# Altium PCB PCB7.PcbDoc
Units mm, origin at the board's own origin, x right, y up, seen from the top; angles counter-clockwise.
Board outline 100.84 x 70.1 mm, 2 copper layers (Top Layer, Bottom Layer); 30 components, 39 nets, 155 pads, 3 vias.
Unrouted connection lines stored in the file: 1.
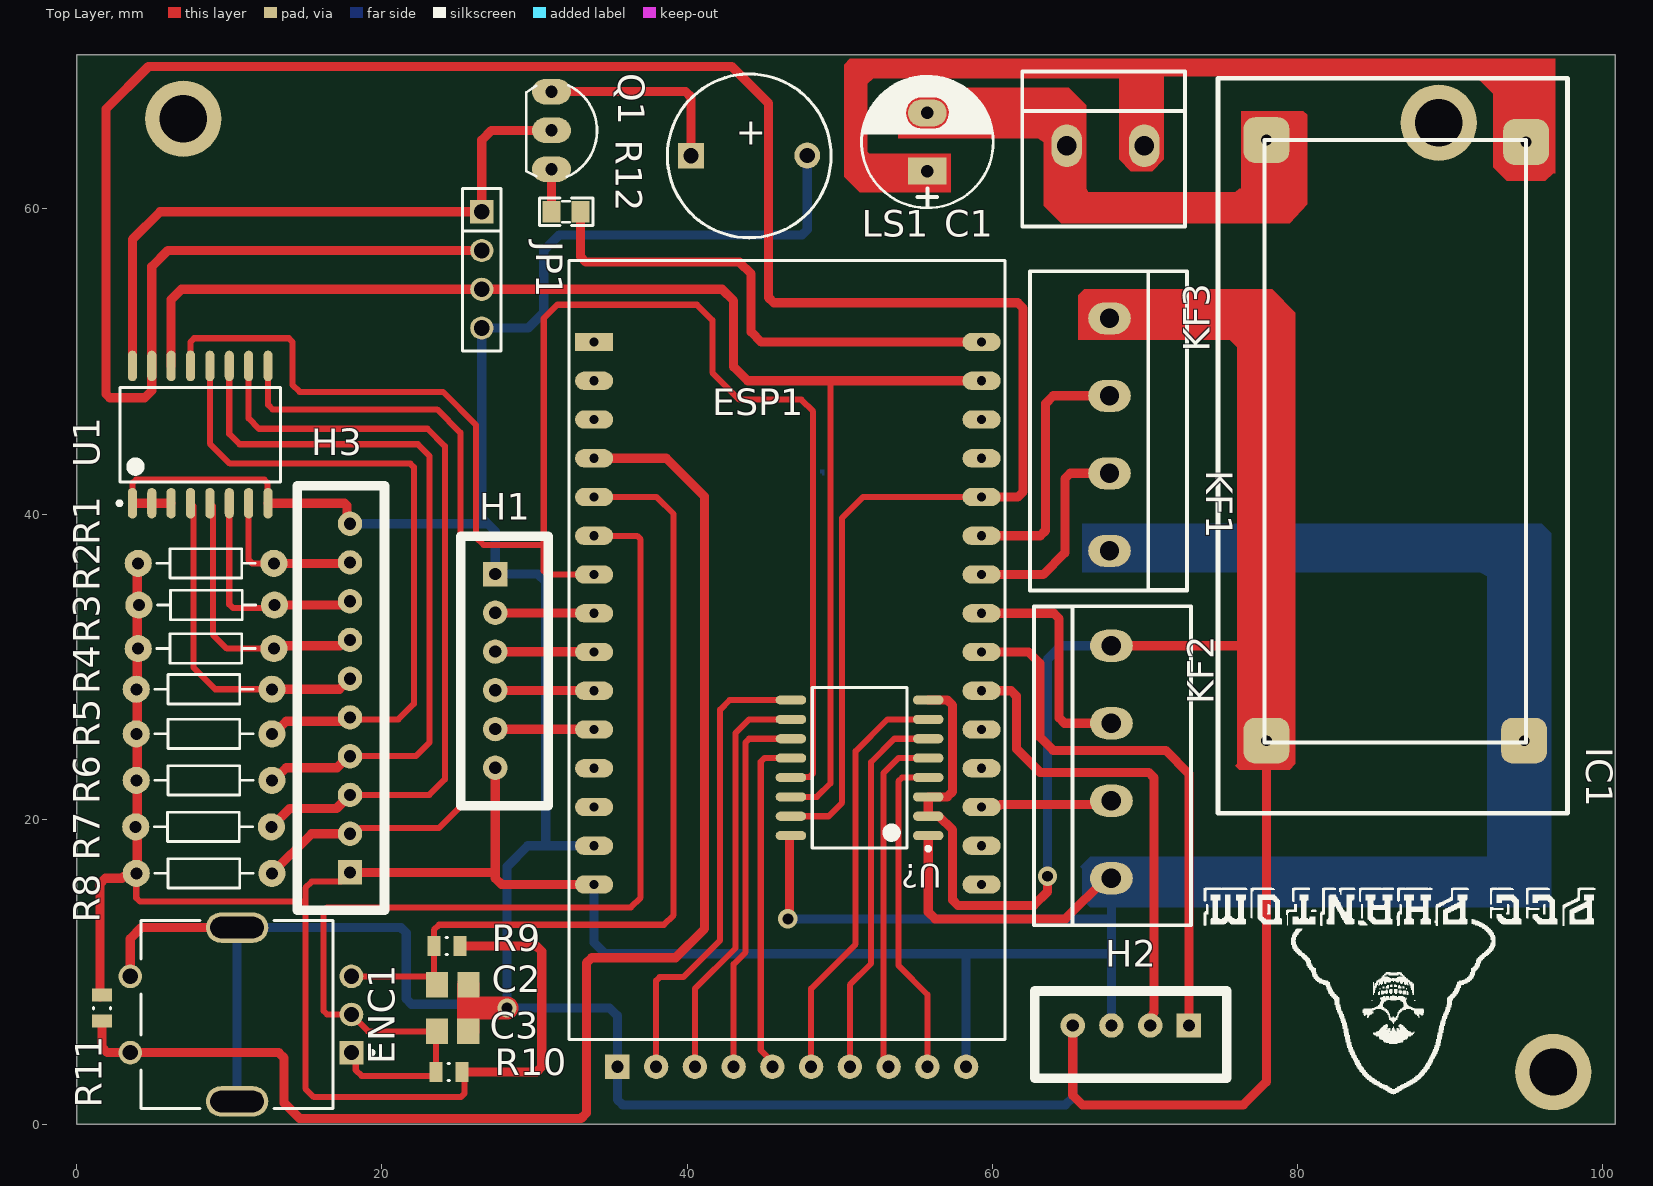
[diagram p0: Top Layer view]
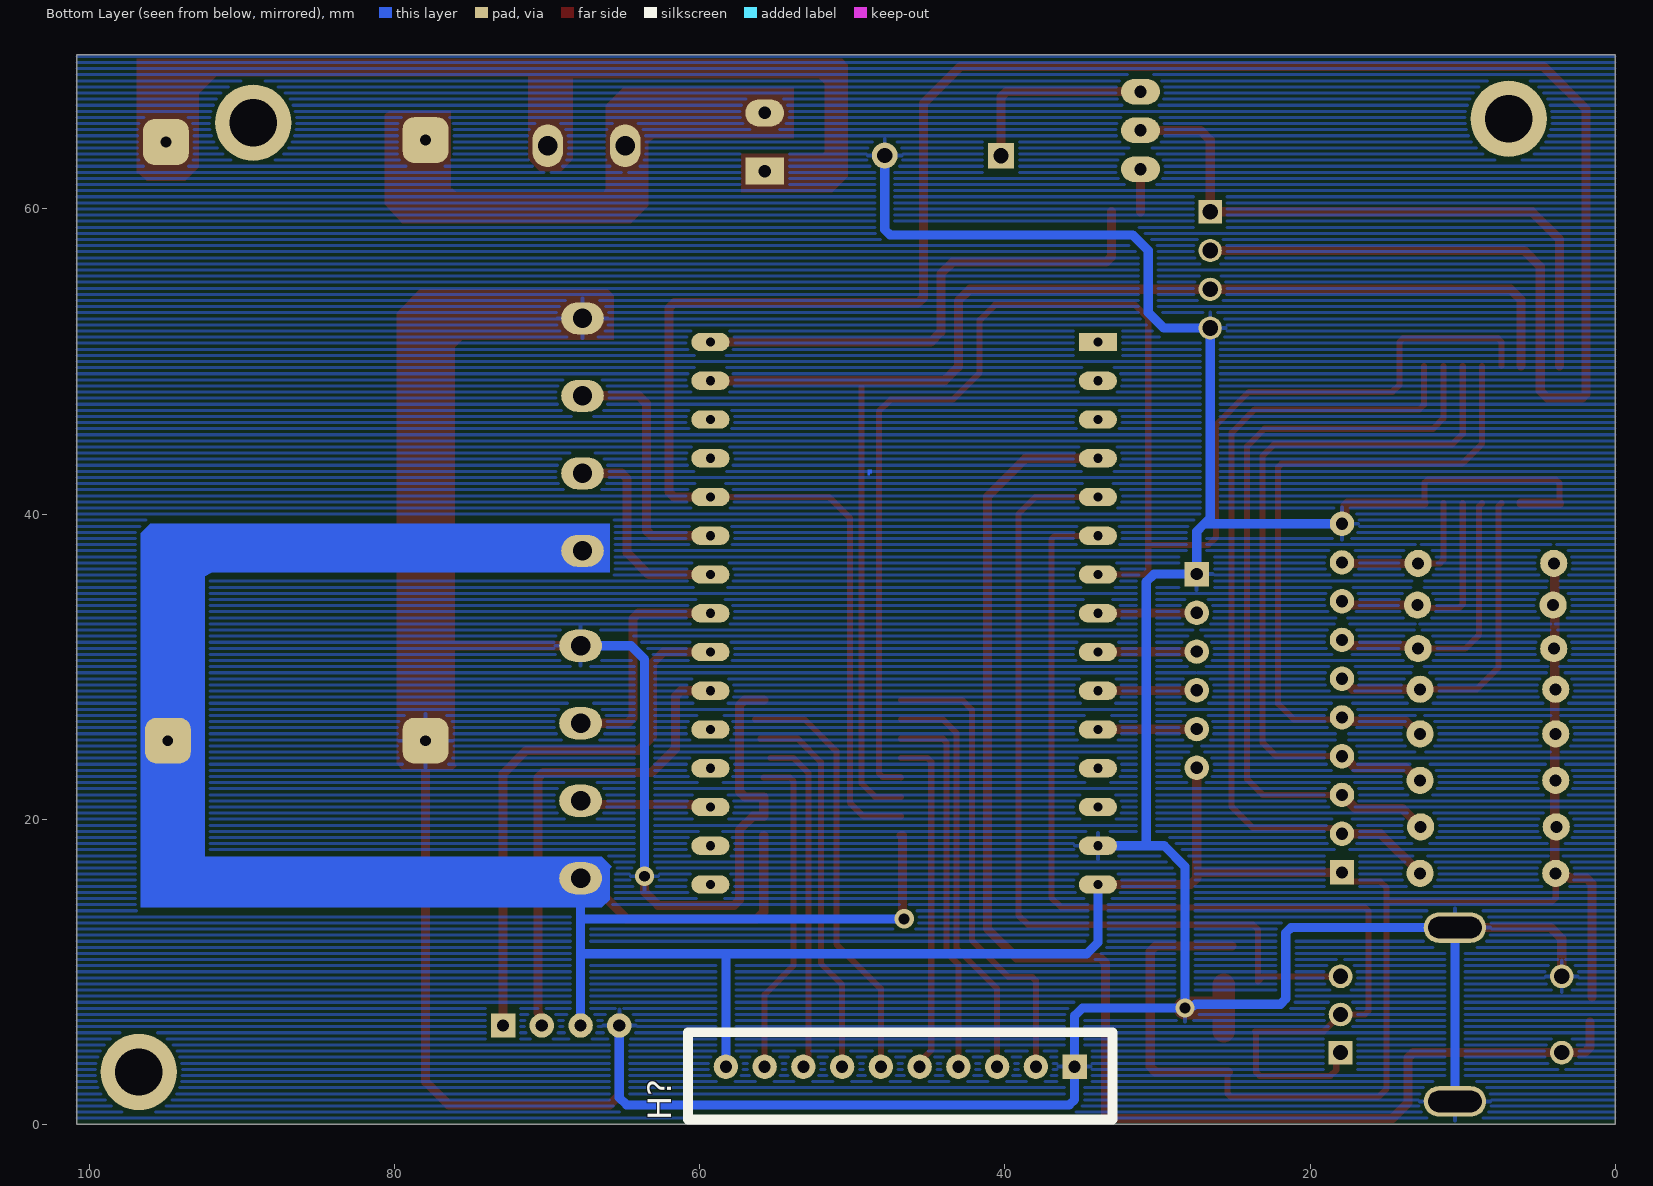
[diagram p1: Bottom Layer view, seen from below]
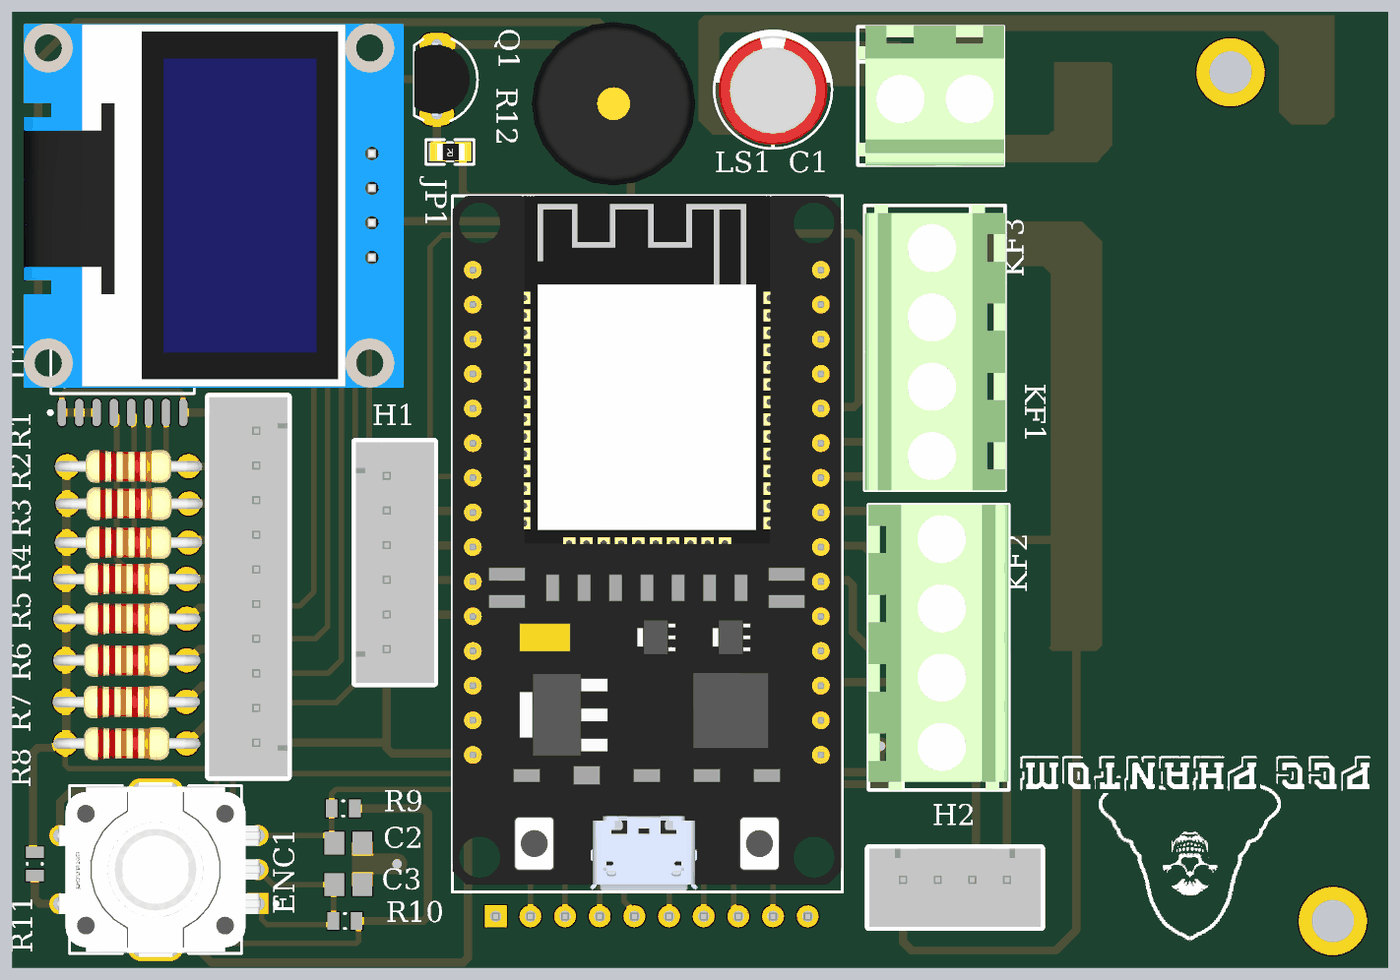
[diagram p2: 3D render of the assembled board from above, using the file's embedded part models]

## Layer stack, top to bottom
Top Solder: solder mask 0.0102, Solder Resist, Dk 3.5
Top Layer: signal copper 0.0356
Dielectric 1: dielectric 0.32, FR-4, Dk 4.8
Bottom Layer: signal copper 0.0356
Bottom Solder: solder mask 0.0102, Solder Resist, Dk 3.5

## Board outline
0,0 100.838,0 100.838,70.104 0,70.104

## Design rules (kind name [scope] priority, off if disabled: settings)
Clearance [All] p1: gap=0.254 ignorepadtopadclearanceinfootprint=FALSE
PolygonConnect [All] p1: connectstyle=Relief reliefconductorwidth=0.254 reliefentries=4 polygonreliefangle="90 Angle" airgapwidth=0.254
RoutingVias [All] p1: holewidth=0.711 width=1.27 viastyle="Through Hole" minholewidth=0.711 minwidth=1.27 maxholewidth=0.711 maxwidth=1.27
SolderMaskExpansion [All] p1: expansion=0.102 istentingtop=FALSE
Width [All] p1: maxlimit=0.6 minlimit=0.4 preferedwidth=0.5
30 further rules are at their usual default settings.

## Components (designator, comment, footprint, x,y, rotation, side; value= is the part's Value field where it differs from the comment)
C1 "100uF/35V" CP1.5/3.4 55.753,62.484 r90 top value=100uF/35V/50V
C2 "C0805X104K4RACTU" CAPC2113X100X50ML30T10 24.638,9.144 r180 top
C3 "C0805X104K4RACTU" CAPC2113X100X50ML30T10 24.629,6.096 r180 top
ENC1 "PEC11L-4020K-S0020" FP-PEC11L-4020K-S0020-MFG 10.502,7.199 r90 top
ESP1 "ESP32 DEVKIT" "ESP32 WROOM 32 KIT" 33.909,51.276 r0 top
H1 "XH-2.54-6P" XH2.54M-6 27.432,36.068 r270 top
H2 "XH-2.54-4P" XH2.54M-4 72.898,6.477 r180 top
H3 "XH-2.54-10P" XH2.54M-10 17.907,16.51 r90 top
H? "XH-2.54-10P" XH2.54M-10 35.433,3.778 r0 bottom
IC1 "lm2596" lm2596 68.326,82.677 r270 top
JP1 "oled" "oled 0.96" 1.143,69.342 r270 top
KF1 "4P" KF128-4P 78.867,58.166 r270 top
KF2 "4P" KF128-4P 56.642,10.795 r90 top
KF3 "2P" KF128-2P 72.644,69.088 r180 top value="Domino KF128 2P GREEN"
LS1 "Coi Chip Speaker" "Coi Chip Speacker" 40.259,63.487 r0 top
Q1 "2SC1815" TO92-123 31.115,65.151 r270 top value=C1815
R1 "1k" R1/4W 12.915,36.771 r180 top value="R1/4W - 1K"
R2 "1k" R1/4W 12.954,34.036 r180 top value="R1/4W - 1K"
R3 "1k" R1/4W 12.915,31.183 r180 top value="R1/4W - 1K"
R4 "1k" R1/4W 12.788,28.516 r180 top value="R1/4W - 1K"
R5 "1k" R1/4W 12.788,25.595 r180 top value="R1/4W - 1K"
R6 "1k" R1/4W 12.788,22.547 r180 top value="R1/4W - 1K"
R7 "1k" R1/4W 12.75,19.499 r180 top value="R1/4W - 1K"
R8 "1k" R1/4W 12.788,16.451 r180 top value="R1/4W - 1K"
R9 "10K 5% 0805(2012)" RESC0805(2012)_L 24.257,11.684 r0 top value="10000.00 Ohm"
R10 "10K 5% 0805(2012)" RESC0805(2012)_L 24.384,3.429 r0 top value="10000.00 Ohm"
R11 "10K 5% 0805(2012)" RESC0805(2012)_L 1.651,7.62 r90 top value="10000.00 Ohm"
R12 "10k" "tro smd 0805" 32.074,59.756 r180 top
U1 "PCF8574DWRE4" DW16_L 8.089,45.212 r90 top
U? "PCF8574DWRE4" DW16_L 51.308,23.368 r180 top

## Footprints (in the part's own frame and the unit in brackets; to place one, negate y for a bottom-side part, rotate by r counter-clockwise, add the part's x,y. Pads: shape width x height; smd on the part's side, far side on the other; paste and mask are expansions set on the pad)
CAPC2113X100X50ML30T10 [mm] "Chip Capacitor, 2-Leads, Body 2.10x1.25mm, IPC Low Density"
  rect 1.45x1.65 smd: 1(-1.025,0) 2(1.025,0)
  body extent -1.2,-0.77 1.2,0.77, height 1
"Coi Chip Speacker" [mm]
  rect 1.7x1.7 hole 1: 1(0,0)
  round 1.7 hole 1: 2(7.62,0.013)
  silkscreen extent -1.55,-5.38 9.18,5.36, body extent -2.19,-6.13 9.81,5.87, height 9.5
CP1.5/3.4 [mil] "Tu hoa 220->470uF,16V, 470uF/16V,25V"
  rect 70x100 hole 32: 1(0,0)
  oval 70x100 hole 32: 2(150,0)
  silkscreen extent -95,-170 245,170, body extent -85,-157 230,157, height 446
DW16_L [mm] "SOIC, 16-Leads, Body 10.3x7.5mm, Pitch 1.27mm, IPC High Density"
  oval 2x0.6 smd: 1(-4.5,4.445) 2(-4.5,3.175) 3(-4.5,1.905) 4(-4.5,0.635) 5(-4.5,-0.635) 6(-4.5,-1.905) 7(-4.5,-3.175) 8(-4.5,-4.445) 9(4.5,-4.445) 10(4.5,-3.175) 11(4.5,-1.905) 12(4.5,-0.635) 13(4.5,0.635) 14(4.5,1.905) 15(4.5,3.175) 16(4.5,4.445)
  silkscreen extent -4.62,-5.25 3.1,5.42, body extent -3.79,-5.25 3.8,5.25, height 2.64
"ESP32 WROOM 32 KIT" [mm]
  rect 2.5x1.2 hole 0.6: 1(0,0)
  oval 2.5x1.2 hole 0.6: 2(0,-2.54) 3(0,-5.08) 4(0,-7.62) 5(0,-10.16) 6(0,-12.7) 7(0,-15.24) 8(0,-17.78) 9(0,-20.32) 10(0,-22.86) 11(0,-25.4) 12(0,-27.94) 13(0,-30.48) 14(0,-33.02) 15(0,-35.56) 16(25.4,-35.56) 17(25.4,-33.02) 18(25.4,-30.48) 19(25.4,-27.94) 20(25.4,-25.4) 21(25.4,-22.86) 22(25.4,-20.32) 23(25.4,-17.78) 24(25.4,-15.24) 25(25.4,-12.7) 26(25.4,-10.16) 27(25.4,-7.62) 28(25.4,-5.08) 29(25.4,-2.54) 30(25.4,0)
  silkscreen extent -1.65,-45.72 26.92,5.33, body extent -1.65,-45.6 26.85,5.33, height 10.49
FP-PEC11L-4020K-S0020-MFG [mm]
  round 1.55 hole 1 paste-2539.97 mask+0: 1(-2.5,7) 2(2.5,7) B(2.5,-7.5) C(0,-7.5)
  rrect100% 2x4.1 hole 3.5 slot 1.4 at 0 deg paste-2539.97 mask+0: 3(-5.7,0) 4(5.7,0)
  rect 1.55x1.55 hole 1 paste-2539.97 mask+0: A(-2.5,-7.5)
  silkscreen extent -6.15,-8.95 6.15,6.3, body extent -6.8,-8.37 6.8,7.88, height 0.25
KF128-2P [mm]
  oval 2x2.8 hole 1.27: 1(2.667,4.953) 2(7.747,4.953)
  silkscreen extent 0,0.08 10.67,10.24, body extent -0.05,0 10.71,10.3, height 14.59
KF128-4P [mm]
  oval 2.1x2.8 hole 1.27: 1(5.334,-11.176) 2(10.414,-11.176) 3(15.494,-11.176) 4(20.574,-11.176)
  silkscreen extent 2.25,-16.38 23.17,-6.1, body extent 2.24,-16.38 23.16,-6.08, height 14.59
lm2596 [mm]
  rrect50% 3x3 hole 0.7: 1(18.288,26.67) 2(18.161,9.652) 3(57.531,9.652) 4(57.531,26.543)
  silkscreen extent 14.1,6.48 62.3,29.39, body extent 14.1,6.35 62.1,29.35, height 12.71
"oled 0.96" [mm]
  rect 1.52x1.52 hole 1.02: 1(9.525,25.4)
  round 1.52 hole 1.02: 2(12.065,25.4) 3(14.605,25.4) 4(17.145,25.4)
  silkscreen extent 8.01,24.13 18.67,26.67, body extent 0.1,-0.3 26.8,27.56, height 11.47
R1/4W [mil] "R 1/4W, 2 Pin, 350mil"
  round 70 hole 31: 1(0,0) 2(350,0)
  silkscreen extent 48,-38 302,38, body extent -40,-47 386,47, height 111
RESC0805(2012)_L [mm] "Chip Resistor, Body 2.0x1.3mm, IPC High Density"
  rect 0.85x1.3 smd: 1(-0.85,0) 2(0.85,0)
  silkscreen extent -0.05,-0.55 0.05,0.55, body extent -1.1,-0.67 1.1,0.68, height 0.7
TO92-123 [mil] "TO-92"
  oval 66x100 hole 32: 1(-100,0) 2(0,0) 3(100,0)
  silkscreen extent -117,-65 120,118, body extent -109,-66 109,95, height 245
"tro smd 0805" [mm]
  rect 1.2x1.4 smd: 1(-0.946,-0.061) 2(0.954,-0.061)
  silkscreen extent -1.75,-0.97 1.75,0.84, body extent -1.56,-0.76 1.44,0.64, height 0.53
XH2.54M-4 [mm]
  rect 1.6x1.6 hole 0.8: 1(0,0)
  round 1.6 hole 0.8: 2(2.54,0) 3(5.08,0) 4(7.62,0)
  silkscreen extent -2.48,-2.26 10.1,3.46, body extent -2.48,-2.26 10.1,3.48, height 6.91
XH2.54M-6 [mm]
  rect 1.6x1.6 hole 0.8: 1(0,0)
  round 1.6 hole 0.8: 2(2.54,0) 3(5.08,0) 4(7.62,0) 5(10.16,0) 6(12.7,0)
  silkscreen extent -2.48,-2.26 15.18,3.46, body extent -2.48,-2.26 15.18,3.48, height 6.91
XH2.54M-10 [mm]
  rect 1.6x1.6 hole 0.8: 1(0,0)
  round 1.6 hole 0.8: 2(2.54,0) 3(5.08,0) 4(7.62,0) 5(10.16,0) 6(12.7,0) 7(15.24,0) 8(17.78,0) 9(20.32,0) 10(22.86,0)
  silkscreen extent -2.48,-2.26 25.34,3.46, body extent -2.48,-2.26 25.34,3.48, height 6.91

## Part data
C1: library part CP3, "Cap 100uF/35V - 470uF/16V", Description 1="1000uF/6,3V - 470uF/16V - 330uF - 25V", Description 2="220uF/35V - 100uF/50V - 63V - 4,7uF/200V", Description 3="22uF => 33uF100V - 3,3uF => 4,7uF/250V", Description 4="2,2uF =>3,3uF/350 - 2,2uF/400V - 1uF/450V"
C2 C3: library part CMP-2007-00010-1, Manufacturer=Kemet, Part Number=C0805X104K4RACTU
ENC1: library part CMP-07421-000057-1, "ROTARY ENCODER", Max Operating Temperature=80°C, Min Operating Temperature=-25°C, Package Quantity=75, Height=12mm, Length=24.5mm, Number of Channels=2, Output Type=Quadrature, Packaging=Bulk, RoHS Compliant=Yes, Termination="Through Hole", Width=11.8mm
ESP1: library part "ESP32 WROOM 32 KIT"
IC1: library part "lm2596 DC-DC", "BOARD MODULE"
JP1: library part "oled 0.96", "OLED", Chung_Loai=Cắm, Don_Vi=Con, Ma_Hang=MH004006, Ten_Linh_Kien="Jump Đơn Cái 2.54MM 1x20P Thẳng"
KF1 KF2: library part "KF128 4P 5.08MM", "DOMINO 5.08MM"
KF3: library part "KF128 2P 5.08MM", "DOMINO 5.08MM"
LS1: "Còi chip"
Q1: "NPN 600mW, ECB"
R1 R2 R3 R4 R5 R6 R7 R8: library part R1/4W, "Resistor 1/4W"
R9 R10 R11: library part CMP-1013-00098-1, "10K 0.125W 5% 0805 (2012 Metric)  SMD", Case-EIA=0805, Case-Metric=2012, Power="0.125 W", Tolerance="5 %", Technology=SMT
R12: library part "Tro 0805 1% 10k", "Dán", Chung_Loai=Dán, Don_Vi=Con, Ma_Hang=MH005473, So_Chan=2, Ten_Linh_Kien="Trở 0805 1% 10k"
U1 U?: library part CMP-0314-00118-1, "Remote 8-Bit I/O Expander for I2C-Bus, 2.5 to 6 V, -40 to 85 degC, 16-pin SOIC (DW), Green (RoHS & no Sb/Br)", Manufacturer="Texas Instruments", Max Frequency(kHz)=100, Voltage Nodes(V)="5, 3.3", # of I/Os=8, Code_JEDEC=MS-013-AA, ComponentLink1Description=Datasheet, ComponentLink1URL=http://www.ti.com/general/docs/lit/getliterature.tsp?genericPartNumber=PCF8574&fileType=pdf, ComponentLink2Description="Package Specification", ComponentLink2URL=http://www.ti.com/litv/pdf/msoi003g, DatasheetVersion=SCPS068G, Eco-Plan="Green (RoHS & no Sb/Br)", fSCLK(Max)(MHz)=0.1, I2C Address="0100 xxx", Interrupt Output=Yes, Mounting Technology="Surface Mount", PackageDescription="16-Pin Small Outline Integrated Circuit, 10.3 x 7.5 mm, Pitch 1.27 mm Pitch", PackageReference=DW16, PackageVersion="revG, Jan-2011", PartNumber=PCF8574DWRE4, Push-Pull I/O Type=Yes, Reset Input=No, SubFamily="I2C IO Expander", Vcc range(V)="2.5 to 6.0", VCC(Max)(V)=6, VCC(Min)(V)=2.5
H1: Chung_Loai=Cắm, Don_Vi=Con, Ma_Hang=MH001972, Ten_Linh_Kien="Header 6P XH2.54-6P Đực Thẳng"
H2: Chung_Loai=Cắm, Don_Vi=Con, Ma_Hang=MH001285, Ten_Linh_Kien="Header 4P XH2.54-4P Đực Thẳng"
H3 H?: Chung_Loai=Cắm, Don_Vi=Con, Ma_Hang=MH001286, Ten_Linh_Kien="Header 10P XH2.54-10P Đực Thẳng"

## Free pads (board coordinates)
  round 5 hole 3.1: 2(6.985,65.913) 2(89.281,65.659) 2(96.774,3.429)

## Via types
v1: diameter 1.27, hole 0.711, Top Layer to Bottom Layer, tented both sides, 3 vias

## Nets (pads, with @x,y where several pads share a name; then routed paths per layer and width w, separated by ;. In a path a pad name is that pad's centre, name@x,y a point inside that pad or via, vN(x,y) a via of type N, cw(c..) or ccw(c..) an arc to the next point about the centre after c; other vN are vias at no path point)
+5: ESP1.15 H1.6 H2.3 H3.1 H?.10 IC1.4 JP1.1 KF1.4 KF2.1 Q1.2 R1.2 R2.2 R3.2 R4.2 R5.2 R6.2 R7.2 R8.2 R9.2 R10.2 R11.2 U1.16 U?.1 U?.16 | length 331.2
  Top Layer w0.4: R8.2 3.898,14.839 4.133,14.605 14.986,14.605 ; H3.1 17.307,15.91 15.402,15.91 14.986,15.494 14.986,14.605 ; R10.2@25.4,3.429 25.4,2.012 25.166,1.778 15.544,1.778 14.986,2.336 14.986,14.605
  Top Layer w0.6: R11.2@1.524,8.345 1.524,15.778 1.875,16.129 2.958,16.129 3.054,16.225 3.673,16.225 R8.2 3.962,16.514 3.962,36.707 R1.2 ; U1.16 3.644,58 5.461,59.817 JP1.1 26.543,64.516 27.178,65.151 Q1.2 ; H3.1 27.432,16.51 ; R9.2 30.129,11.684 30.48,11.333 30.48,3.78 30.129,3.429 R10.2@25.359,3.429 ; H1.6 27.432,16.51 ; ESP1.15 27.845,15.716 27.432,16.129 27.432,16.51 ; v1(46.609,13.462) 46.708,13.561 46.708,18.923 U?.16 ; U?.1 55.808,13.915 56.261,13.462 64.801,13.462 67.468,16.129 KF2.1
  Bottom Layer w0.6: ESP1.15 33.909,11.908 34.641,11.176 58.42,11.176 ; v1(46.609,13.462) 67.818,13.462 ; H?.10 58.293,11.049 58.42,11.176 ; KF1.4 95.153,37.592 95.504,37.241 95.504,25.781 IC1.4 94.869,17.145 93.853,16.129 KF2.1 67.818,13.462 ; H2.3 67.818,11.176 67.818,13.462 ; 67.818,11.049 67.691,11.176 58.42,11.176
CHA_ROTARY: C2.2 ENC1.B ESP1.5 R9.1 | length 57
  Top Layer w0.4: ENC1.B 23.088,9.699 C2.2@23.407,9.38 ; C2.2@23.407,9.35 C2.2@23.407,9.38 ; ESP1.5 38.005,41.116 39.116,40.005 39.116,13.716 38.481,13.081 23.749,13.081 23.407,12.739 R9.1 C2.2@23.407,9.38
CHB_ROTARY: C3.2 ENC1.A ENC1.C ESP1.6 R10.1 | length 71.8
  Top Layer w0.4: ENC1.A 18.286,4.416 18.286,3.558 18.669,3.175 23.309,3.175 23.534,3.4 23.534,6.026 C3.2 19.105,6.096 ENC1.C 16.403,7.199 16.169,7.433 16.169,13.99 16.403,14.224 36.322,14.224 36.957,14.859 36.957,38.341 36.723,38.576 ESP1.6
GND: C2.1 C3.1 ENC1.2 ENC1.3 ENC1.4 ESP1.14 H1.1 H2.4 H3.10 H?.1 IC1.3 JP1.4 KF1.1 KF2.4 LS1.2 U1.1 U1.2 U1.3 U1.8 U?.2 U?.3 U?.8 | length 342
  Top Layer w0.4: U1.1 3.644,42.018 3.879,42.252 12.3,42.252 12.496,42.056 12.496,40.75 U1.8 ; C3.1 C3.1@25.658,6.1 ; C2.1@25.658,9.144 C2.1
  Top Layer w0.6: ENC1.2 3.502,12.168 4.233,12.899 ENC1.4 ; U1.1 U1.2 U1.3 ; U1.8 17.556,40.712 17.716,40.552 17.716,39.561 H3.10 ; U?.8 57.053,27.813 57.404,27.462 57.404,21.814 57.053,21.463 U?.3 U?.2 56.508,20.193 57.404,19.297 57.404,14.702 57.755,14.351 62.738,14.351 63.627,15.24 v1(63.627,16.256) ; H2.4 65.278,1.905 65.913,1.27 76.454,1.27 77.978,2.794 IC1.3 77.978,31.242 ; KF1.1 76.835,52.832 77.978,51.689 77.978,31.242 ; KF2.4 77.851,31.369 77.978,31.242
  Top Layer w1.5: C3.1@25.658,6.1 C2.1@25.658,9.144 ; 25.663,7.62 v1(28.194,7.62)
  Bottom Layer w0.6: ENC1.3 ENC1.4 21.239,12.899 21.59,12.548 21.59,8.225 21.941,7.874 27.508,7.874 ; H3.10 26.924,39.37 ; v1@27.633,7.748 28.066,7.748 v1(28.194,7.62) 34.925,7.62 35.433,7.112 H?.1 35.433,1.621 35.784,1.27 64.8,1.27 65.278,1.748 H2.4 ; v1@28.194,7.874 28.194,16.891 29.559,18.256 30.734,18.256 ; ESP1.14 30.734,18.256 ; LS1.2 47.879,58.644 47.528,58.293 31.623,58.293 30.607,57.277 30.607,53.213 29.591,52.197 JP1.4 26.543,39.751 26.924,39.37 ; v1(63.627,16.256) 63.627,30.48 64.516,31.369 KF2.4 ; 26.924,39.37 27.432,38.862 H1.1 30.226,36.068 30.734,35.56 30.734,18.256
INTERRUT_B: ESP1.7 U1.13 U?.13 | length 104.9
  Top Layer w0.4: U1.13 7.454,51.289 7.689,51.523 13.901,51.523 14.136,51.289 14.136,48.475 14.605,48.006 24.003,48.006 26.162,45.847 26.162,38.481 26.67,37.973 30.607,37.973 ; ESP1.7 30.861,36.036 ; U?.13 46.846,22.771 48.026,22.771 48.262,23.008 48.262,46.734 47.498,47.498 43.434,47.498 41.656,49.276 41.656,52.705 40.64,53.721 31.496,53.721 30.607,52.832 30.607,37.973 ; 30.607,36.29 30.607,37.973 ; 30.607,36.29 30.607,36.27 30.841,36.036 30.861,36.036 ; 30.607,36.29 30.734,36.163 30.861,36.036
NetC1_1: C1.1 IC1.1 KF3.1 | length 63.6
  Top Layer w0.6: C1.1 51.689,62.484 51.054,63.119 51.054,68.326 52.07,69.342 69.977,69.342 ; KF3.1 69.977,69.342 ; IC1.1 94.996,67.437 93.091,69.342 69.977,69.342
NetC1_2: C1.2 IC1.2 KF3.2 | length 31.2
  Top Layer w0.6: C1.2 63.881,66.294 64.232,65.943 64.232,65.578 64.897,64.914 KF3.2 64.897,60.549 65.248,60.198 76.962,60.198 77.978,61.214 IC1.2
NetLS1_1: LS1.1 Q1.1 | length 13.1
  Top Layer w0.6: Q1.1 39.908,67.691 40.259,67.34 LS1.1
NetQ1_3: Q1.3 R12.2 | length 2.8
  Top Layer w0.6: Q1.3 31.118,62.608 31.118,59.819 R12.2
PIN+BUZZER: ESP1.30 R12.1 | length 33.8
  Top Layer w0.6: R12.1 33.02,56.866 33.371,56.515 43.434,56.515 44.196,55.753 44.196,51.943 44.863,51.276 ESP1.30
PIN_5: ESP1.23 KF2.3 | length 15.3
  Top Layer w0.6: ESP1.23 64.038,33.496 64.389,33.144 64.389,26.64 64.74,26.289 KF2.3
PIN_14: ESP1.11 H1.5 | length 6.5
  Top Layer w0.6: H1.5 27.448,25.892 33.893,25.892 ESP1.11
PIN_15: ESP1.18 KF2.2 | length 8.7
  Top Layer w0.6: ESP1.18 59.424,20.91 60.498,20.91 60.543,20.955 67.564,20.955 KF2.2
PIN_18: ESP1.24 KF1.3 | length 14
  Top Layer w0.6: ESP1.24 63.341,36.036 64.77,37.465 64.77,42.321 65.121,42.672 KF1.3
PIN_19: ESP1.25 KF1.2 | length 17.1
  Top Layer w0.6: ESP1.25 63.149,38.576 63.5,38.927 63.5,47.244 64.008,47.752 KF1.2
PIN_25: ESP1.8 H1.2 | length 6.5
  Top Layer w0.6: H1.2 27.448,33.512 33.893,33.512 ESP1.8
PIN_26: ESP1.9 H1.3 | length 6.5
  Top Layer w0.6: H1.3 27.448,30.972 33.893,30.972 ESP1.9
PIN_27: ESP1.10 H1.4 | length 6.5
  Top Layer w0.6: H1.4 27.448,28.432 33.893,28.432 ESP1.10
RX: ESP1.21 H2.2 | length 32
  Top Layer w0.6: ESP1.21 61.244,28.416 61.595,28.064 61.595,24.608 63.138,23.065 70.261,23.065 70.612,22.714 70.612,7.328 70.549,7.266 70.549,6.668 H2.2
SCL: ESP1.29 JP1.3 U1.14 U?.14 | length 92.1
  Top Layer w0.4: U?.14 48.514,21.463 49.403,22.352 49.403,48.736 ; ESP1.29@58.659,48.736 ESP1.29
  Top Layer w0.6: U1.14 6.184,54.063 6.858,54.737 JP1.3 42.291,54.737 43.053,53.975 43.053,49.657 43.974,48.736 49.403,48.736 ESP1.29@58.659,48.736
SDA: ESP1.26 JP1.2 U1.15 U?.15 | length 174.5
  Top Layer w0.4: U?.15 49.276,20.193 50.165,21.082 50.165,39.751 51.53,41.116 ESP1.26
  Top Layer w0.6: JP1.2 5.969,57.277 4.914,56.222 U1.15 4.914,48.094 4.445,47.625 2.159,47.625 1.905,47.879 1.905,66.548 4.699,69.342 42.926,69.342 45.339,66.929 45.339,54.199 45.69,53.848 61.679,53.848 62.031,53.497 62.031,41.467 61.679,41.116 ESP1.26
SW1: H3.9 R1.1 U1.7 | length 10.5
  Top Layer w0.4: U1.7 11.264,37.005 11.499,36.771 R1.1
  Top Layer w0.6: R1.1 17.848,36.771 H3.9
SW2: H3.8 R2.1 U1.6 | length 14.7
  Top Layer w0.4: U1.6 9.994,34.084 10.229,33.85 R2.1@12.915,33.85
  Top Layer w0.6: R2.1 17.653,34.036 H3.8
SW3: H3.7 R3.1 U1.5 | length 18.3
  Top Layer w0.4: U1.5 8.924,40.512 8.924,32.097 9.838,31.183 R3.1
  Top Layer w0.6: R3.1 13.102,31.369 17.255,31.369 17.636,31.75 H3.7
SW4: H3.6 R4.1 U1.4 | length 22
  Top Layer w0.4: U1.4 7.654,40.512 7.654,29.938 9.077,28.516 R4.1
  Top Layer w0.6: R4.1 17.213,28.516 H3.6
SW5: H3.5 R5.1 U1.12 | length 44.9
  Top Layer w0.4: U1.12 8.724,44.616 10.033,43.307 21.864,43.307 22.098,43.073 22.098,27.559 21.082,26.543 18.034,26.543 H3.5
  Top Layer w0.6: R5.1 12.907,25.595 13.729,26.416 17.382,26.416 17.636,26.67 H3.5
SW6: H3.4 R6.1 U1.11 | length 48.3
  Top Layer w0.4: U1.11 9.994,45.251 10.668,44.577 22.352,44.577 23.114,43.815 23.114,25.019 22.225,24.13 H3.4
  Top Layer w0.6: R6.1 12.907,22.547 13.729,23.368 17.056,23.368 17.818,24.13 H3.4
SW7: H3.3 R7.1 U1.10 | length 51.6
  Top Layer w0.4: U1.10 11.264,46.267 11.938,45.593 22.987,45.593 24.13,44.45 24.13,22.606 23.114,21.59 H3.3
  Top Layer w0.6: R7.1 13.952,20.701 17.018,20.701 H3.3
SW8: H3.2 R8.1 U1.9 | length 54.6
  Top Layer w0.4: U1.9 12.534,47.156 12.827,46.863 23.622,46.863 25.146,45.339 25.146,20.828 23.749,19.431 18.613,19.431 18.232,19.05 H3.2
  Top Layer w0.6: R8.1 15.388,19.05 H3.2
SW_ROTARY: ENC1.1 ESP1.4 R11.1 | length 92.3
  Top Layer w0.6: R11.1@1.651,6.715 1.651,5.05 2.002,4.699 13.238,4.699 13.589,4.348 13.589,1.397 14.605,0.381 33.05,0.381 33.401,0.732 33.401,10.571 33.752,10.922 39.243,10.922 41.148,12.827 41.148,41.148 38.64,43.656 ESP1.4
SWA: H?.9 U?.4 | length 21.6
  Top Layer w0.4: H?.9 55.753,8.509 53.848,10.414 53.848,22.479 54.102,22.733 U?.4
SWB: H?.8 U?.5 | length 22.3
  Top Layer w0.4: H?.8 52.885,4.106 52.885,23.04 53.848,24.003 U?.5@55.372,24.003
SWC: H?.7 U?.6 | length 25.1
  Top Layer w0.4: H?.7 50.673,9.144 52.07,10.541 52.07,23.749 53.594,25.273 U?.6@56.033,25.273
SWD: H?.6 U?.7 | length 28.1
  Top Layer w0.4: H?.6 48.133,8.89 51.054,11.811 51.054,24.458 53.139,26.543 U?.7@56.38,26.543
SWE: H?.5 U?.12 | length 22.4
  Top Layer w0.4: H?.5 45.593,4.102 44.831,4.864 44.831,23.769 45.065,24.003 U?.12
SWF: H?.4 U?.11 | length 24.7
  Top Layer w0.4: H?.4 43.053,10.505 43.834,11.286 43.834,25.039 44.068,25.273 U?.11
SWG: H?.3 U?.10 | length 27
  Top Layer w0.4: H?.3 40.513,8.89 43.18,11.557 43.18,25.654 44.069,26.543 U?.10
SWH: H?.2 U?.9 | length 30.9
  Top Layer w0.4: H?.2 37.973,9.418 38.207,9.652 39.751,9.652 42.164,12.065 42.164,27.178 42.799,27.813 U?.9
TX: ESP1.22 H2.1 | length 36.2
  Top Layer w0.6: ESP1.22 62.39,30.956 63.119,30.226 63.119,25.4 64.008,24.511 71.374,24.511 72.898,22.987 H2.1
pads on no net: ESP1.1 ESP1.2 ESP1.3 ESP1.12 ESP1.13 ESP1.16 ESP1.17 ESP1.19 ESP1.20 ESP1.27 ESP1.28

## Polygon pours and split planes (outlines as drawn)
GND on Bottom Layer "NONET_L-01_P-001" (hatched Horizontal grid 0.4 track 0.2, pour order 0): 0,70.104 100.838,70.104 100.838,0 0,0

## Other copper
Top Layer:
  region net NetC1_1: 96.901,65.405 96.901,62.357 96.774,62.357 96.266,61.849 93.726,61.849 92.837,62.738 92.837,67.564 91.694,68.707 71.628,68.707 71.247,68.707 71.247,67.945 71.247,63.246 70.485,62.484 69.088,62.484 68.326,63.246 68.326,68.58 52.197,68.58 51.816,68.199 51.816,63.754 51.943,63.627 57.277,63.627 57.277,61.087 51.308,61.087 50.292,62.103 50.292,69.469 50.673,69.85 96.901,69.85
  region net NetC1_2: 76.327,66.421 76.327,61.341 76.2,61.341 75.946,61.087 66.294,61.087 66.167,61.341 66.167,61.468 66.167,66.802 65.024,67.945 53.848,67.945 53.848,67.437 53.848,66.929 53.848,64.643 62.611,64.643 62.992,64.643 63.373,64.389 63.373,60.198 64.516,59.055 76.581,59.055 79.502,59.055 80.645,60.325 80.645,60.452 80.645,66.167 80.391,66.421
  region net GND: 65.659,51.435 65.659,54.356 66.04,54.737 78.359,54.737 79.883,53.213 79.883,23.622 79.502,23.241 76.2,23.241 75.946,23.495 76.073,23.622 76.073,50.927 75.565,51.435
Bottom Layer:
  region: 48.997,42.662 48.997,42.533 48.868,42.533 48.868,42.662 48.738,42.662 48.738,42.921 48.997,42.921 48.997,42.792
  region net +5: 92.456,26.793 92.456,17.526 66.421,17.526 65.786,16.891 65.913,16.764 65.913,14.732 66.421,14.224 96.647,14.224 96.647,26.793
  region net +5: 65.913,36.703 65.913,36.83 65.913,39.37 66.167,39.37 66.548,39.37 96.012,39.37 96.647,38.735 96.647,23.368 95.885,22.606 92.964,22.606 92.456,23.114 92.456,35.941 91.948,36.195 91.44,36.195 65.913,36.195

## Silkscreen, mask and mechanical layers (free items; w line width, h text height)
Top Overlay:
  drawing of 56 lines, arcs and shapes, not listed

## Text inside footprints (layer, text, board x,y; h text height)
LS1: Top Overlay "+" at 43.203,63.616 h3